# Altium PCB 传感器板2.PcbDoc (part 1 of 2)
Units mil, origin at the board's own origin, x right, y up, seen from the top; angles counter-clockwise.
Board outline 3909.32 x 2704.64 mil, 2 copper layers (Top Layer, Bottom Layer); 96 components, 116 nets, 368 pads, 95 vias.
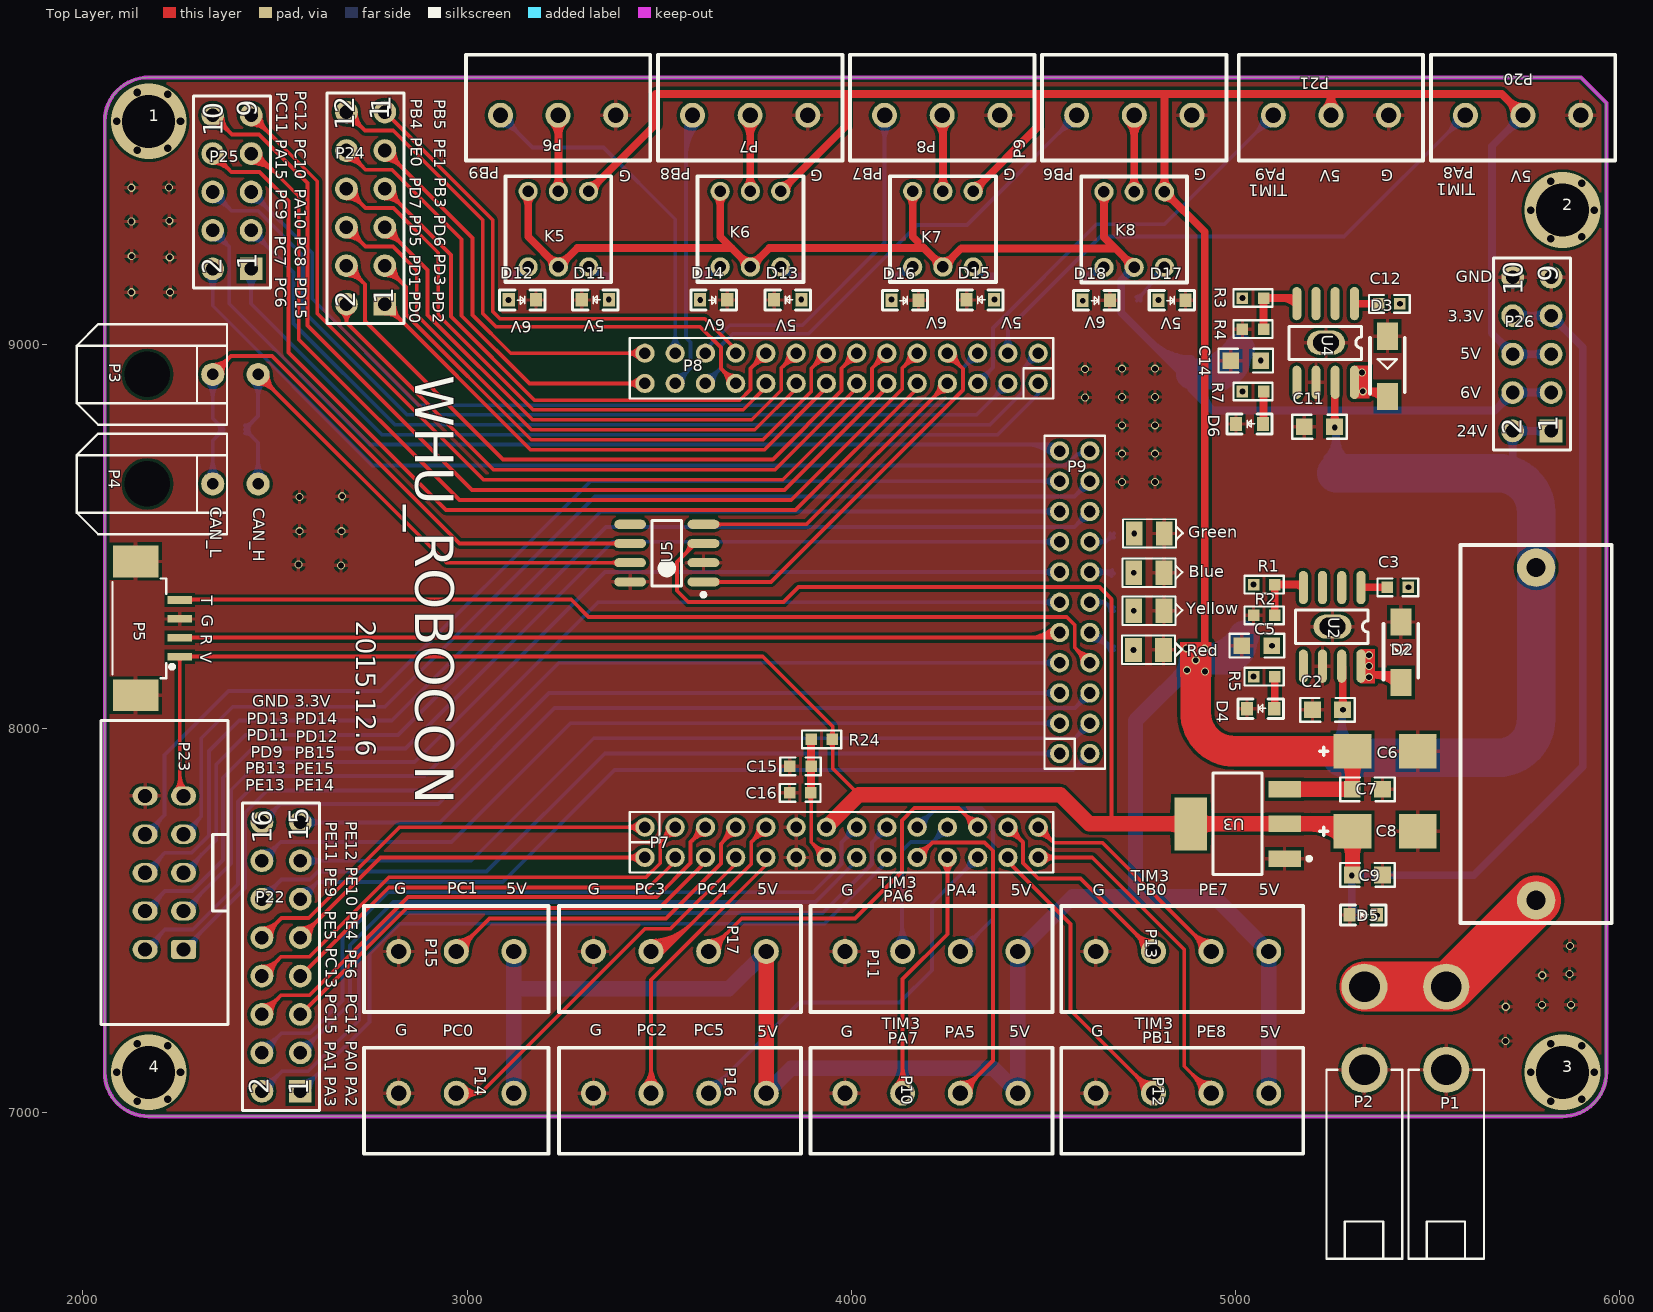
[diagram p0: Top Layer view]
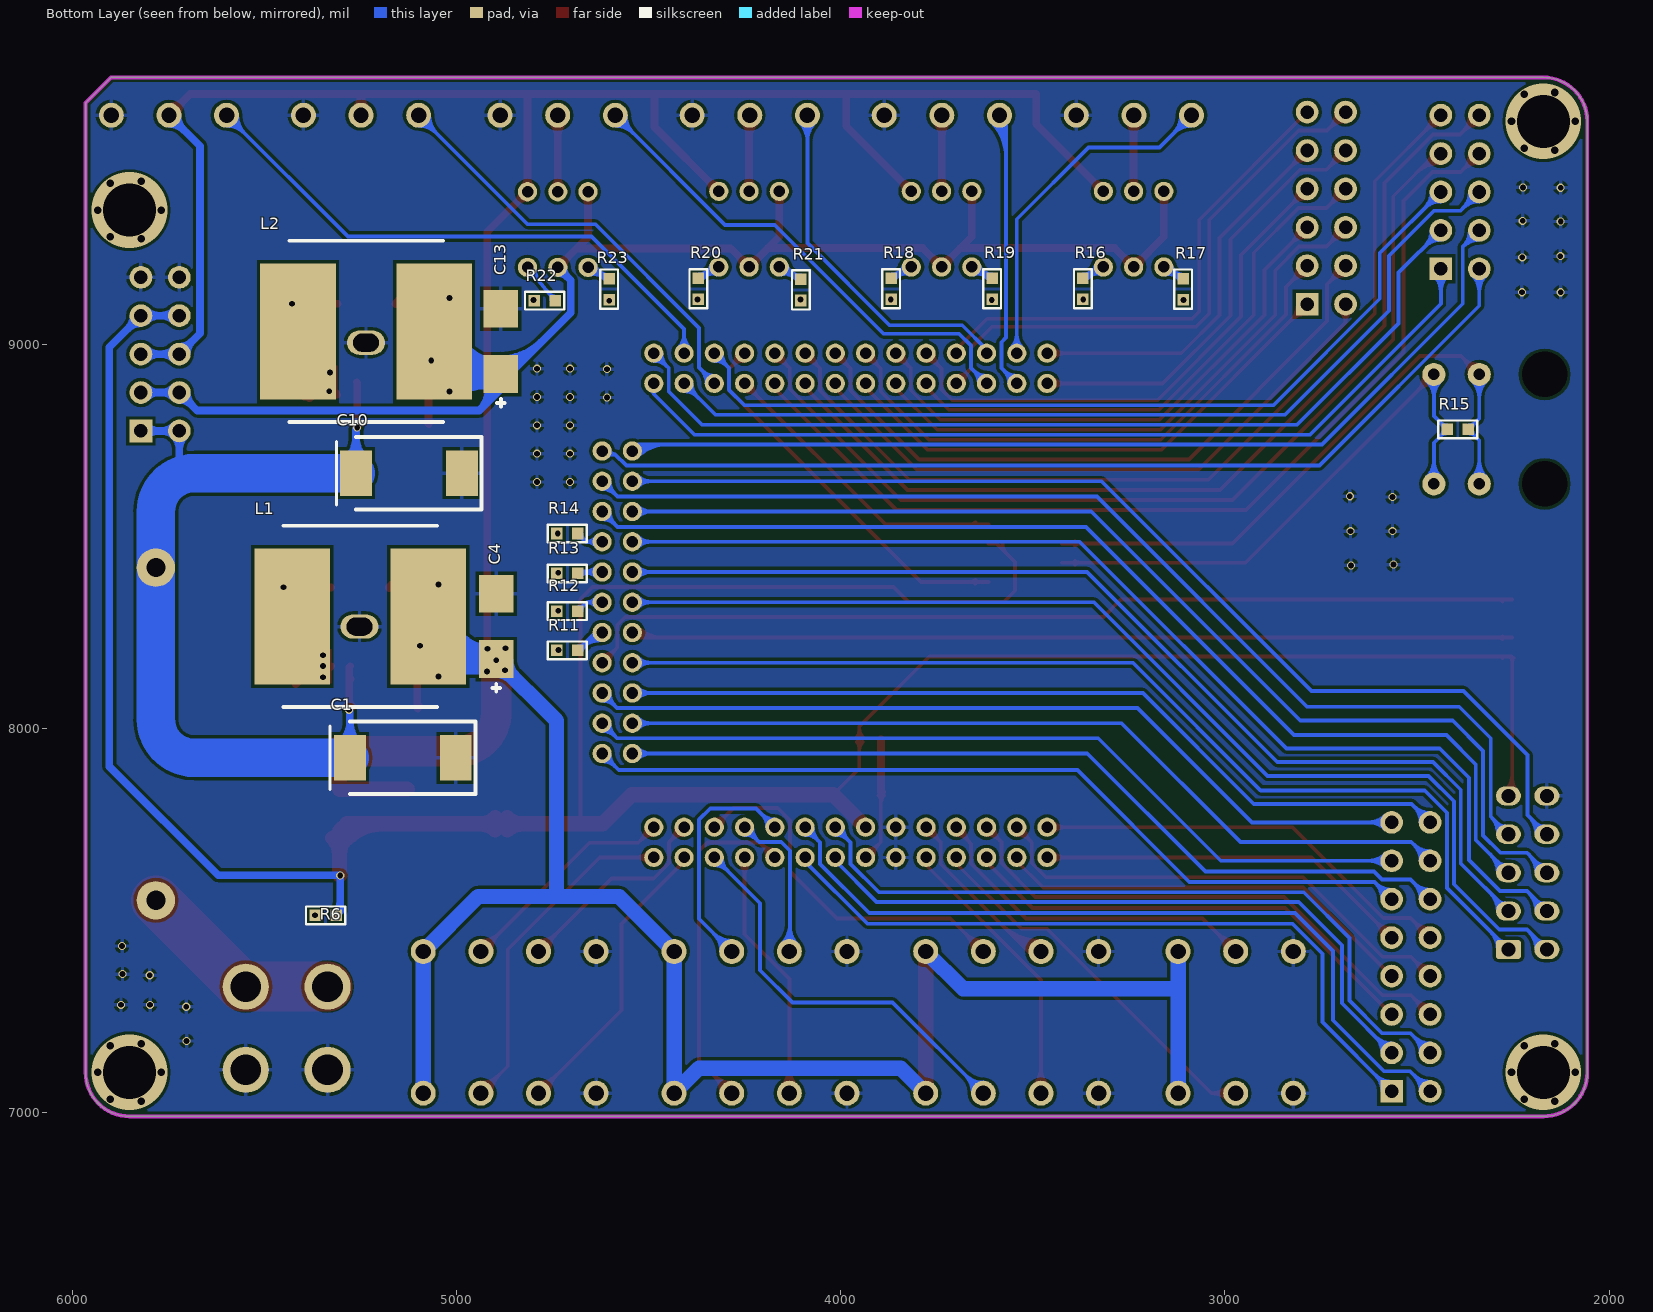
[diagram p1: Bottom Layer view, seen from below]

## Layer stack, top to bottom
Top Layer: signal copper 1.4
Dielectric: dielectric 12.6, FR-4, Dk 4.8
Bottom Layer: signal copper 1.4

## Board outline
2056.68,7105 2056.68,9581 cw(c2171,9581) 2171,9695.32 5899.68,9695.32 5966,9629 5966,7105 cw(c5851.68,7105) 5851.68,6990.68 2171,6990.68 cw(c2171,7105)

## Design rules (kind name [scope] priority, off if disabled: settings)
Clearance [All] p1: gap=8
HoleSize [All] p1: absolutevalues=TRUE maxlimit=500 minlimit=1 maxpercent=80.000 minpercent=20.000
HoleToHoleClearance [All] p1: gap=2 allowstackedmicrovias=TRUE
MinimumSolderMaskSliver [All] p1: minsoldermaskwidth=5
PolygonConnect [All] p1: connectstyle=Relief reliefconductorwidth=10 reliefentries=4 polygonreliefangle="90 Angle"
RoutingVias [All] p1: holewidth=28 width=50 viastyle="Through Hole" minholewidth=28 minwidth=50 maxholewidth=28 maxwidth=50
SilkToSilkClearance [All] p1: silktosilkclearance=0
SilkscreenOverComponentPads [All] p1: minsilkscreentomaskgap=0
SolderMaskExpansion [All] p1: expansion=4
Width [All] p1: maxlimit=200 minlimit=10 preferedwidth=10
23 further rules are at their usual default settings.

## Classes and differential pairs
component class 传感器板2: 1 2 3 4 Blue C1 C2 C3 C4 C5 C6 C7 C8 C9 C10 C11 C12 C13 C14 C15 C16 D2 D3 D4 D5 D6 D7 D11 D12 D13 D14 D15 D16 D17 D18 Green K5 K6 K7 K8 L1 L2 P1 P2 P3 P4 P5 P10 P11 P12 P13 P14 P15 P16 P17 P22 P23 P24 P25 P26 R1 R2 R3 R4 R5 R6 R7 R11 R12 R13 R14 R15 R16 R17 R18 R19 R20 R21 R22 R23 R24 Red U2 U3 U4 U5 Yellow

## Components (designator, comment, footprint, x,y, rotation, side; value= is the part's Value field where it differs from the comment)
1 "定位孔" 定位孔 2171,9581 r90 top
2 "定位孔" 定位孔 5851.68,9350 r90 top
3 "定位孔" 定位孔 5851.68,7105 r90 top
4 "定位孔" 定位孔 2171,7105 r90 top
Blue "LED(0805)" LED(0805) 4775,8406 r270 top
C1 "106T" "TAN CAP" 5078,7949 r180 bottom
C2 "1UF(0805)" CAP(0805) 5240,8049 r180 top
C3 "0.01UF(0603)" CAP(0603) 5423,8368 r180 top
C4 "106C" TAN106C 4897,8181 r90 bottom
C5 "1UF(0805)" CAP(0805) 5056,8216 r180 top
C6 "106C" TAN106C 5305,7941 r0 top
C7 "0.1UF(0805)" CAP(0805) 5344,7842 r0 top
C8 "106C" TAN106C 5305,7733 r0 top
C9 "0.1UF(0805)" CAP(0805) 5344,7619 r0 top
C10 "106T" "TAN CAP" 5062,8690 r180 bottom
C11 "1UF(0805)" CAP(0805) 5219,8786 r180 top
C12 "0.01UF(0603)" CAP(0603) 5401,9106 r180 top
C13 "106C" TAN106C 4885,8923 r90 bottom
C14 "1UF(0805)" CAP(0805) 5027,8958 r180 top
C15 "10UF(0603)" CAP(0603) 3868,7902 r0 top
C16 "0.1UF(0603)" CAP(0603) 3867,7833 r0 top
D2 "B340" B340 5431,8199 r270 top
D3 "B340" B340 5396,8943 r270 top
D4 "LED红(0603)" LED红(0603) 5066.01,8052 r180 top
D5 "LED蓝(0603)" LED蓝(0603) 5333,7515 r180 top
D6 "LED黄(0603)" LED黄(0603) 5037.01,8793 r180 top
D11 "LED蓝(0603)" LED蓝(0603) 3334,9116 r180 top
D12 "LED红(0603)" LED红(0603) 3144,9116 r0 top
D13 "LED蓝(0603)" LED蓝(0603) 3835,9116 r180 top
D14 "LED红(0603)" LED红(0603) 3642,9116 r0 top
D15 "LED蓝(0603)" LED蓝(0603) 4336,9116 r180 top
D16 "LED红(0603)" LED红(0603) 4140,9115 r0 top
D17 "LED蓝(0603)" LED蓝(0603) 4835,9115 r0 top
D18 "LED红(0603)" LED红(0603) 4638,9115 r0 top
Green "LED(0805)" LED(0805) 4776,8508 r270 top
K5 "andongkaiguan" PCBComponent_1#1 3100,9438 r270 top
K6 "andongkaiguan" PCBComponent_1#1 3600,9438 r270 top
K7 "andongkaiguan" PCBComponent_1#1 4101,9438 r270 top
K8 "andongkaiguan" PCBComponent_1#1 4599,9437 r270 top
L1 "L_22uH" L_22uH 5251,8292 r270 bottom
L2 "L_22uH" L_22uH 5236,9034 r270 bottom
P1 "MX4.2mm 5569 2X1AW" "MX4.2mm 5569 2X1AW" 5549,7220 r90 top
P2 "MX4.2mm 5569 2X1AW" "MX4.2mm 5569 2X1AW" 5336,7220 r90 top
P3 "MX3.0mm_43025_2Pin" MX3.0mm_43025_2Pin 1955,8804 r0 top
P4 "MX3.0mm_43025_2Pin" MX3.0mm_43025_2Pin 1955,8519 r0 top
P5 "MOLEX1.25_4Pin" MOLEX1.25_4Pin 2252,8261 r90 top
P6 "KF2EDG_3P" PCBComponent_1#2 3237,9596.76 r180 top
P7 "Header_2x14(2.0mm)" Header_2x14(2.0mm) 3975,7704 r0 top
P7 "KF2EDG_3P" PCBComponent_1#2 3737,9596.76 r180 top
P8 "Header_2x14(2.0mm)" Header_2x14(2.0mm) 3975,8938 r180 top
P8 "KF2EDG_3P" PCBComponent_1#2 4237,9596.76 r180 top
P9 "Header_2x11(2.0mm)" Header_2x11(2.0mm) 4582,8329 r90 top
P9 "KF2EDG_3P" PCBComponent_1#2 4737,9596.76 r180 top
P10 "KF2EDG_4P" PCBComponent_1#3 4209,7051 r0 top
P11 "KF2EDG_4P" PCBComponent_1#3 4209,7420 r0 top
P12 "KF2EDG_4P" PCBComponent_1#3 4862,7051 r0 top
P13 "KF2EDG_4P" PCBComponent_1#3 4862,7420 r0 top
P14 "KF2EDG_3P" PCBComponent_1#2 2972,7051 r0 top
P15 "KF2EDG_3P" PCBComponent_1#2 2972,7420 r0 top
P16 "KF2EDG_4P" PCBComponent_1#3 3554,7051 r0 top
P17 "KF2EDG_4P" PCBComponent_1#3 3554,7420 r0 top
P20 "KF2EDG_3P" PCBComponent_1#2 5749,9596.76 r180 top
P21 "KF2EDG_3P" PCBComponent_1#2 5249,9596.76 r180 top
P22 "Header 8X2" HDR2X8 2566,7056 r90 top
P23 "2x5HDR_F" 2x5HDR_F 2212,7625 r0 top
P24 "Header 6X2" HDR2X6 2786,9105 r90 top
P25 "Header 5X2" HDR2X5 2438,9197 r90 top
P26 "Header 5X2" HDR2X5 5822,8775 r90 top
R1 "10K(0603)" RES(0603) 5075,8375 r0 top
R2 "3.24K(0603)" RES(0603) 5075,8295.13 r180 top
R3 "3.9K(0603)" RES(0603) 5046,9121 r0 top
R4 "1K(0603)" RES(0603) 5046,9039.88 r180 top
R5 "4.7K(0603)" RES(0603) 5075,8135.4 r180 top
R6 "2K(0603)" RES(0603) 5341,7514 r180 bottom
R7 "4.7K(0603)" RES(0603) 5046,8877.65 r180 top
R11 "1K(0603)" RES(0603) 4712,8204 r180 bottom
R12 "1K(0603)" RES(0603) 4712,8306 r180 bottom
R13 "1K(0603)" RES(0603) 4712,8404 r180 bottom
R14 "1K(0603)" RES(0603) 4712,8508 r180 bottom
R15 "120R(0603)" RES(0603) 2394,8779 r180 bottom
R16 "RES(0603)" RES(0603) 3370,9145 r90 bottom
R17 "RES(0603)" RES(0603) 3109,9144 r90 bottom
R18 "RES(0603)" RES(0603) 3869,9145 r90 bottom
R19 "RES(0603)" RES(0603) 3606,9145 r90 bottom
R20 "RES(0603)" RES(0603) 4371,9145 r90 bottom
R21 "RES(0603)" RES(0603) 4104,9142 r90 bottom
R22 "RES(0603)" RES(0603) 4771,9114 r180 bottom
R23 "RES(0603)" RES(0603) 4603,9144 r90 bottom
R24 "RES(0603)" RES(0603) 3923,7972 r0 top
Red "LED(0805)" LED(0805) 4774,8205 r270 top
U2 "TPS5430" TPS5430 5252,8265 r270 top
U3 "AMS1117-3.3" AMS1117-3.3 5006,7752 r90 top
U4 "TPS5430" TPS5430 5235,9004 r270 top
U5 "VP230" VP230 3520,8457 r180 top
Yellow "LED(0805)" LED(0805) 4775,8307 r270 top
? "BAOXIANZUO" BAOXIANZUO 5783,7553 r90 top

## Footprints (in the part's own frame and the unit in brackets; to place one, negate y for a bottom-side part, rotate by r counter-clockwise, add the part's x,y. Pads: shape width x height; smd on the part's side, far side on the other; paste and mask are expansions set on the pad)
2x5HDR_F [mil]
  rrect30% 65x50 hole 37: 1(50,-200)
  oval 65x50 hole 37: 2(-50,-200) 3(50,-100) 4(-50,-100) 5(50,0) 6(-50,0) 7(50,100) 8(-50,100) 9(50,200) 10(-50,200)
  silkscreen extent -165,-396 165,396
AMS1117-3.3 [mm]
  rect 1.1x2.15 smd: 1(-2.3,-3.1) 2(0,-3.1) 3(2.3,-3.1)
  rect 3.5x2.15 smd: 4(0,3.1)
  silkscreen extent -3.35,-4.85 3.35,1.63
B340 [mm]
  rect 1.8x1.4 smd: 1(-2,0) 2(2,0)
  silkscreen extent -1.87,-1.14 1.81,1.14
BAOXIANZUO [mm]
  round 2.54 hole 1.27: 1(0,0) 2(22,0)
  silkscreen extent -1.5,-5 23.5,5
CAP(0603) [mil]
  rect 30x30 smd mask+1: 1(27.5,0) 2(-27.5,0)
  silkscreen extent -53,-23 53,23
CAP(0805) [mm]
  rect 1.1x1.1 smd mask+0.025: 1(-0.994,0) 2(0.995,0)
  silkscreen extent -1.8,-0.79 1.8,0.79
HDR2X5 [mm] "Connec"
  rect 1.5x1.5 hole 0.9: 1(0,0)
  round 1.5 hole 0.9: 2(0,2.54) 3(2.54,0) 4(2.54,2.54) 5(5.08,0) 6(5.08,2.54) 7(7.62,0) 8(7.62,2.54) 9(10.16,0) 10(10.16,2.54)
  silkscreen extent -1.27,-1.27 11.43,3.81
HDR2X6 [mm] "Connec"
  rect 1.5x1.5 hole 0.9: 1(0,0)
  round 1.5 hole 0.9: 2(0,2.54) 3(2.54,0) 4(2.54,2.54) 5(5.08,0) 6(5.08,2.54) 7(7.62,0) 8(7.62,2.54) 9(10.16,0) 10(10.16,2.54) 11(12.7,0) 12(12.7,2.54)
  silkscreen extent -1.27,-1.27 13.97,3.81
HDR2X8 [mm] "Connector; Header; 8x2 Po"
  rect 1.5x1.5 hole 0.9: 1(0,0)
  round 1.5 hole 0.9: 2(0,2.54) 3(2.54,0) 4(2.54,2.54) 5(5.08,0) 6(5.08,2.54) 7(7.62,0) 8(7.62,2.54) 9(10.16,0) 10(10.16,2.54) 11(12.7,0) 12(12.7,2.54) 13(15.24,0) 14(15.24,2.54) 15(17.78,0) 16(17.78,2.54)
  silkscreen extent -1.27,-1.27 19.05,3.81
Header_2x11(2.0mm) [mm]
  round 1.27 hole 0.762 mask+0.025: 1(-10,1) 2(-10,-1) 3(-8,1) 4(-8,-1) 5(-6,1) 6(-6,-1) 7(-4,1) 8(-4,-1) 9(-2,1) 10(-2,-1) 11(0,1) 12(0,-1) 13(2,1) 14(2,-1) 15(4,1) 16(4,-1) 17(6,1) 18(6,-1) 19(8,1) 20(8,-1) 21(10,1) 22(10,-1)
  silkscreen extent -11,-2 11,2
Header_2x14(2.0mm) [mm]
  round 1.27 hole 0.762 mask+0.025: 1(-13,1) 2(-13,-1) 3(-11,1) 4(-11,-1) 5(-9,1) 6(-9,-1) 7(-7,1) 8(-7,-1) 9(-5,1) 10(-5,-1) 11(-3,1) 12(-3,-1) 13(-1,1) 14(-1,-1) 15(1,1) 16(1,-1) 17(3,1) 18(3,-1) 19(5,1) 20(5,-1) 21(7,1) 22(7,-1) 23(9,1) 24(9,-1) 25(11,1) 26(11,-1) 27(13,1) 28(13,-1)
  silkscreen extent -14,-2 14,2
L_22uH [mm]
  rect 9x5 smd: 1(0,4.5) 2(0,-4.5)
  silkscreen extent -6,-5.08 5.99,5.08
LED(0805) [mil]
  rect 63x43.31 smd mask+1: 1(0,39.15) 2(0,-39.15)
  silkscreen extent -37,-69 37,87
LED红(0603) [mm]
  rect 0.8x0.9 smd: 1(-0.9,0) 2(0.9,0)
  silkscreen extent -1.5,-0.65 1.5,0.65
LED蓝(0603) [mm]
  rect 0.8x0.9 smd: 1(-0.9,0) 2(0.9,0)
  silkscreen extent -1.5,-0.65 1.5,0.65
LED黄(0603) [mm]
  rect 0.8x0.9 smd: 1(-0.9,0) 2(0.9,0)
  silkscreen extent -1.5,-0.65 1.5,0.65
MOLEX1.25_4Pin [mm]
  rect 0.5x1.6 smd: 1(-1.875,0) 2(-0.625,0) 3(0.625,0) 4(1.875,0)
  rect 2.1x3 smd: 5(-4.425,2.9) 6(4.425,2.9)
  silkscreen extent -3.3,0.38 3.3,4.44
MX3.0mm_43025_2Pin [mil]
  round 60 hole 30 mask+1: 1(383,118.09) 2(501.11,118.09)
  round 0 hole 118.11: ""(212.92,118.09)
  silkscreen extent 29,-13 420,249
"MX4.2mm 5569 2X1AW" [mil]
  round 120 hole 80: 1(-108.27,0) 2(108.27,0)
  silkscreen extent -600,-98 -108,98
PCBComponent_1#1 [mm]
  round 1.27 hole 0.762: 1(1,5.5) 2(1,3.5) 3(1,1.5) 4(6,5.5) 5(6,3.5) 6(6,1.5)
  silkscreen extent 0,0 7,7
PCBComponent_1#2 [mm]
  round 1.651 hole 1.016: 1(-3.81,0) 2(0,0) 3(3.81,0)
  silkscreen extent -6.1,-4 6.1,3
PCBComponent_1#3 [mm]
  round 1.651 hole 1.016: 1(-5.715,0) 2(-1.905,0) 3(1.905,0) 4(5.715,0)
  silkscreen extent -8,-4 8,3
RES(0603) [mil]
  rect 30x30 smd mask+1: 1(27.5,0) 2(-27.5,0)
  silkscreen extent -51,-23 51,23
TAN106C [mil]
  rect 98.43x90 smd: 1(0,0) 2(170,0)
  silkscreen extent -85,-10 -65,10
"TAN CAP" [mm]
  rect 2.1x3 smd: 1(-5.08,-0.635) 2(1.92,-0.635)
  silkscreen extent -6.38,-3.04 3.22,1.76
TPS5430 [mm]
  oval 2.2x0.6 smd: 1(-2.6,1.905) 2(-2.6,0.635) 3(-2.6,-0.635) 4(-2.6,-1.905) 5(2.6,-1.905) 6(2.6,-0.635) 7(2.6,0.635) 8(2.6,1.905)
  oval 1.6x2.5 hole 1.2 slot 1.7 at 90 deg: 9(-0.016,0.025)
  silkscreen extent -1.1,-2.41 1.1,2.36
VP230 [mm]
  oval 2.1x0.6 smd: 1(-2.425,1.905) 2(-2.425,0.635) 3(-2.425,-0.635) 4(-2.425,-1.905) 5(2.425,-1.905) 6(2.425,-0.635) 7(2.425,0.635) 8(2.425,1.905)
  silkscreen extent -2.55,-2.15 0.98,2.88, body extent -3.03,-2.5 3.03,2.5, height 1.9
定位孔 [mil]

## Part data
Blue Green Red Yellow: library part LED
C2 C3 C5 C7 C9 C11 C12 C14 C15 C16: library part CAP
C4 C6 C8 C13 U2 U4: library part T
D4 D5 D6 D11 D12 D13 D14 D15 D16 D17 D18: library part L
K5 K6 K7 K8: library part andongk
P1 P2: library part "MX4.2mm 5569"
P3 P4: library part MX3.0mm_4302
P5: library part MOLEX1.2
P6 P7 P8 P9 P10 P11 P12 P13 P14 P15 P16 P17 P20 P21: library part KF2
P7 P8: library part Header_2x14(
P9: library part Header_2x11(
P22: "Header, 8-Pin, Dual row"
P23: library part 2x
P24: "Header, 6-Pin, Dual row"
P25 P26: "Header, 5-Pin, Dual row"
R1 R2 R3 R4 R5 R6 R7 R11 R12 R13 R14 R15 R16 R17 R18 R19 R20 R21 R22 R23 R24: library part RES
U3: library part AMS11
?: library part BAOX

## Via types
v1: diameter 21, hole 15, Top Layer to Bottom Layer, 67 vias
v2: diameter 19.68, hole 19.68, Top Layer to Bottom Layer, 24 vias
v3: diameter 196.85/196.85 (per signal layer), hole 137.8, Top Layer to Bottom Layer, 4 vias

## Nets (pads, with @x,y where several pads share a name; then routed paths per layer and width w, separated by ;. In a path a pad name is that pad's centre, name@x,y a point inside that pad or via, vN(x,y) a via of type N, cw(c..) or ccw(c..) an arc to the next point about the centre after c; other vN are vias at no path point)
3.3V: C8.1 C9.1 P5.1 P7.13 P23.9 P26.7 P26.8 R6.1 R24.1 U3.2 U3.4 U5.3 | length 8843.3
  Top Layer w10: P23.9@2240.36,7839.14 ccw(c2212.25,7867.25) 2252,7867.25 ; P23.9@2246.97,7843.53 ccw(c2243.94,7851) 2252,7851 ; P5.1@2248.58,8183.76 cw(c2240.31,8175.49) 2252,8175.49 cw(c2263.69,8175.49) P5.1@2255.42,8183.76 ; 2252,7855.18 ccw(c2284.68,7855.18) P23.9@2261.57,7832.07 ; 2252,7879.32 ccw(c2308.82,7879.32) P23.9@2268.64,7839.14 ; P5.1@2252,8187.18 2252,7851 ; P5.1@2254,8188.18 3769.82,8188.18 3952,8006 3952,7896.26 4020.26,7828 ; P23.9@2257.37,7844.79 cw(c2258.27,7851) 2252,7851 ; P23.9@2277,7826 2252,7851 ; P5.1@2277.08,8183.76 cw(c2287.76,8173.08) 2287.76,8188.18 ; 3567.91,8454.91 ccw(c3540.83,8482) U5.3@3579.13,8482 ; U5.3@3615.47,8482 3595,8482 3547,8434 3547,8359 3576,8330 3824,8330 3863,8369 4646,8369 4678,8337 4678,7752 ; R24.1@3943.43,7964.93 cw(c3922.74,7944.24) 3952,7944.24 ; R24.1@3943.43,7979.07 ccw(c3922.74,7999.76) 3952,7999.76 ; 3952,7951.48 cw(c3971.02,7951.48) R24.1@3957.57,7964.93 ; 3952,7992.52 ccw(c3971.02,7992.52) R24.1@3957.57,7979.07
  Top Layer w40: P7.13@3935.63,7743.37 4020.26,7828 4544,7828 4620,7752 4678,7752 U3.4@4883.95,7752 U3.2@5128.05,7752 5286,7752 C8.1@5305,7733 5305,7619.15 C9.1@5304.85,7619 ; U3.4@4868.17,7736.22 ccw(c4830.06,7698.11) 4830.06,7752 ccw(c4830.06,7805.89) U3.4@4868.17,7767.78 ; U3.4@4899.74,7736.22 cw(c4937.84,7698.11) 4937.84,7752 cw(c4937.84,7805.89) U3.4@4899.74,7767.78 ; 5194.56,7752 cw(c5194.56,7626.77) C8.1@5283.11,7715.32 ; C8.1@5287.32,7715.32 cw(c5244.64,7672.64) 5305,7672.64 cw(c5365.36,7672.64) C8.1@5322.68,7715.32
  Bottom Layer w20: 5303,7551.42 ccw(c5350.92,7551.42) R6.1@5317.04,7517.54 ; R6.1@5313.5,7514 5303,7524.5 v1(5303,7618) 5621,7618 5904.53,7901.53 5904.53,8992.47 P26.7@5822,9075 P26.8@5722,9075 ; P26.8@5735.81,9061.19 cw(c5769.14,9027.86) 5769.14,9075 cw(c5769.14,9122.14) P26.8@5735.81,9088.81 ; P26.7@5808.19,9061.19 ccw(c5774.86,9027.86) 5774.86,9075 ccw(c5774.86,9122.14) P26.7@5808.19,9088.81 ; P26.7@5822,9055.47 cw(c5822,9008.33) 5855.34,9041.66 cw(c5888.67,9075) P26.7@5841.53,9075
5V: C4.1 C5.1 C6.1 C7.1 K5.1 K6.1 K7.1 K8.1 L1.1 P10.4 P11.4 P12.4 P13.4 P14.3 P15.3 P16.4 P17.4 P20.2 P21.2 P26.5 P26.6 R1.2 R5.1 U3.3 | length 12002.4
  Top Layer w20: K5.1@3316.54,9398.63 3491,9573.09 3491,9652 3988,9652 ; K5.1@3316.54,9413.63 ccw(c3316.54,9449.84) 3342.14,9424.24 ccw(c3367.75,9398.63) K5.1@3331.54,9398.63 ; K6.1@3816.54,9398.63 3986,9568.09 3986,9650 3988,9652 ; K6.1@3816.54,9413.63 ccw(c3816.54,9449.84) 3842.14,9424.24 ccw(c3867.75,9398.63) K6.1@3831.54,9398.63 ; K7.1@4317.54,9398.63 4485,9566.09 4485,9652 ; K7.1@4317.54,9413.63 ccw(c4317.54,9449.84) 4343.14,9424.24 ccw(c4368.75,9398.63) K7.1@4332.54,9398.63 ; 4485,9653 4485,9652 ; K8.1@4804.93,9408.24 ccw(c4779.32,9433.84) 4815.54,9433.84 ccw(c4851.75,9433.84) K8.1@4826.14,9408.24 ; K8.1@4815.54,9382.63 cw(c4815.54,9346.42) 4841.14,9372.02 cw(c4866.75,9397.63) K8.1@4830.54,9397.63 ; v1(4920,8208) 4920,9293.17 K8.1@4815.54,9397.63 4815.54,9650.46 4814,9652 ; P21.2@5233.09,9612.67 ccw(c5194.68,9651.08) 5249,9651.08 ccw(c5303.32,9651.08) P21.2@5264.91,9612.67 ; P21.2@5249,9596.76 5249,9652 ; P20.2@5726.5,9596.76 ccw(c5672.18,9596.76) 5710.59,9635.17 ccw(c5749,9673.58) P20.2@5749,9619.26 ; P20.2@5749,9596.76 5693.76,9652 5249,9652 ; 3988,9652 4485,9652 ; 4485,9652 4814,9652 ; 4814,9652 5249,9652
  Top Layer w40: P16.4@3779,7051 P17.4@3779,7420 ; U3.3@5128.05,7842.55 5128.6,7842 C7.1@5304.85,7842 5305,7842.15 C6.1@5305,7941 ; C6.1@5287.32,7923.32 cw(c5244.64,7880.64) 5305,7880.64 cw(c5365.36,7880.64) C6.1@5322.68,7923.32
  Top Layer w80: v1(4897,8178) 4897,8041 ccw(c4997,8041) 4997,7941 C6.1@5305,7941
  Bottom Layer w20: P26.6@5702.47,8975 ccw(c5655.33,8975) 5688.66,9008.34 ccw(c5722,9041.67) P26.6@5722,8994.53 ; P20.2@5726.5,9596.76 cw(c5672.18,9596.76) 5710.59,9558.35 cw(c5749,9519.94) P20.2@5749,9574.26 ; P26.6@5735.81,8961.19 cw(c5769.14,8927.86) 5769.14,8975 cw(c5769.14,9022.14) P26.6@5735.81,8988.81 ; P20.2@5749,9596.76 5668,9515.76 5668,9029 P26.6@5722,8975 P26.5@5822,8975 ; P26.5@5808.19,8961.19 ccw(c5774.86,8927.86) 5774.86,8975 ccw(c5774.86,9022.14) P26.5@5808.19,8988.81
  Bottom Layer w40: P14.3@3122,7051 3122,7323 ; P15.3@3122,7420 3122,7323 ; P16.4@3779,7051 3844,7116 4369,7116 P10.4@4434,7051 P11.4@4434,7420 4577,7563 4740,7563 ; P17.4@3779,7420 3682,7323 3122,7323 ; C4.1@4852.25,8133.25 cw(c4897,8088.5) C4.1@4897,8151.79 ; C4.1@4855.18,8136.18 ccw(c4814.57,8176.79) C4.1@4872,8176.79 ; v1(4897,8178) 4740,8021 4740,7563 ; P12.4@5087,7051 P13.4@5087,7420 4944,7563 4740,7563
  Bottom Layer w80: C4.1@4897,8181 4972,8181 ccw(c4972,8225.09) L1.1@5015.8,8220 ; C4.1@4921.01,8181 ccw(c4921.01,8296.7) L1.1@5022.55,8241.26
  other v1: 5047.5,8135.4 4921,8149 4874,8152 4873,8209 5095.15,8216 5047.5,8375
6V: C13.1 C14.1 K5.3 K5.5 K6.3 K6.5 K7.3 K7.5 K8.3 K8.5 L2.1 P26.3 P26.4 R3.2 R7.1 | length 5273.7
  Top Layer w20: K5.3@3148.45,9388.02 cw(c3122.84,9362.42) 3159.06,9362.42 cw(c3195.27,9362.42) K5.3@3169.66,9388.02 ; K5.3@3159.06,9398.63 3159.06,9280.52 K5.5@3237.8,9201.78 3287.02,9251 3688.57,9251 ; K5.5@3222.8,9201.78 ccw(c3186.58,9201.78) 3212.19,9227.39 ccw(c3237.8,9252.99) 3237.8,9216.78 ccw(c3237.8,9252.99) 3263.4,9227.39 ccw(c3289.01,9201.78) K5.5@3252.8,9201.78 ; K6.3@3648.45,9388.02 cw(c3622.84,9362.42) 3659.06,9362.42 cw(c3695.27,9362.42) K6.3@3669.66,9388.02 ; K6.3@3659.06,9398.63 3659.06,9280.52 3688.57,9251 ; K6.5@3722.8,9201.78 ccw(c3686.58,9201.78) 3712.19,9227.39 ccw(c3737.8,9252.99) 3737.8,9216.78 ccw(c3737.8,9252.99) 3763.4,9227.39 ccw(c3789.01,9201.78) K6.5@3752.8,9201.78 ; K7.3@4149.45,9388.02 cw(c4123.84,9362.42) 4160.06,9362.42 cw(c4196.27,9362.42) K7.3@4170.66,9388.02 ; K7.3@4160.06,9398.63 4160.06,9280.52 4189.57,9251 ; K7.5@4223.8,9201.78 ccw(c4187.58,9201.78) 4213.19,9227.39 ccw(c4238.8,9252.99) 4238.8,9216.78 ccw(c4238.8,9252.99) 4264.4,9227.39 ccw(c4290.01,9201.78) K7.5@4253.8,9201.78 ; K8.3@4647.45,9387.02 cw(c4621.84,9361.42) 4658.06,9361.42 cw(c4694.27,9361.42) K8.3@4668.66,9387.02 ; K8.3@4658.06,9397.63 4658.06,9279.52 4687.57,9250 ; K8.5@4721.8,9200.78 ccw(c4685.58,9200.78) 4711.19,9226.39 ccw(c4736.8,9251.99) K8.5@4736.8,9215.78 ; K8.5@4736.8,9200.78 4687.57,9250 ; 3688.57,9251 K6.5@3737.8,9201.78 3787.02,9251 4189.57,9251 ; 4189.57,9251 K7.5@4238.8,9201.78 4287.02,9250 4687.57,9250
  Bottom Layer w20: K8.5@4721.8,9200.78 cw(c4685.58,9200.78) 4711.19,9175.17 cw(c4736.8,9149.57) K8.5@4736.8,9185.78 ; K8.5@4736.8,9200.78 4703,9166.98 4703,9083 4863,8923 C13.1@4885,8923 4885,8884 4941,8828 ; 4780.5,9005.5 ccw(c4885,9109.99) C13.1@4885,8962.21 ; 4814.65,8971.35 ccw(c4885,9041.71) C13.1@4885,8942.21 ; C13.1@4899.51,8914.97 ccw(c4962.22,8898.48) 4916.37,8852.63 ; C13.1@4918.85,8909.89 ccw(c5001.22,8888.23) 4941,8828 ; P26.4@5702.47,8875 cw(c5655.33,8875) 5688.66,8841.66 cw(c5722,8808.33) P26.4@5722,8855.47 ; P26.4@5735.81,8861.19 cw(c5769.14,8827.86) 5769.14,8875 cw(c5769.14,8922.14) P26.4@5735.81,8888.81 ; P26.3@5808.19,8861.19 ccw(c5774.86,8827.86) 5774.86,8875 ccw(c5774.86,8922.14) P26.3@5808.19,8888.81 ; P26.3@5822,8875 P26.4@5722,8875 5675,8828 4941,8828
  Bottom Layer w80: 4960,8919 4956,8923 ; L2.1@5000.87,8962.57 cw(c4956,8968.22) 4956,8923 ; L2.1@5010.92,8988.69 cw(c4885.01,9076.51) C13.1@4885,8923 4956,8923
  other v1: 5018.5,8877.65 5066.15,8958 5018.5,9121
24V: ?.1 P1.2 P2.2 | length 540.1
  Top Layer w130: P2.2@5336,7328.27 P1.2@5549,7328.27 5558.27,7328.27 ?.1@5783,7553
CAN_H: P3.2 P4.2 R15.2 U5.7 | length 2041.8
  Top Layer w10: P3.2@2456.11,8897.09 cw(c2456.11,8836.74) 2498.79,8879.42 cw(c2541.47,8922.09) P3.2@2481.11,8922.09 ; P3.2@2456.11,8907.09 cw(c2456.11,8870.88) 2481.72,8896.49 cw(c2507.32,8922.09) P3.2@2471.11,8922.09 ; P3.2@2456.11,8922.09 2946.2,8432 U5.7@3424.53,8432 ; U5.7@3390.18,8427.18 ccw(c3378.56,8415.56) 3378.56,8432 ccw(c3378.56,8448.44) U5.7@3390.18,8436.82
  Bottom Layer w10: R15.2@2421.5,8769 cw(c2421.5,8744.86) 2438.57,8761.93 cw(c2455.64,8779) 2431.5,8779 cw(c2455.64,8779) 2438.57,8796.07 cw(c2421.5,8813.14) R15.2@2421.5,8789 ; P4.2@2438.43,8654.77 ccw(c2395.75,8697.45) 2456.11,8697.45 ccw(c2516.47,8697.45) P4.2@2473.79,8654.77 ; P3.2@2438.43,8904.42 cw(c2395.75,8861.74) 2456.11,8861.74 cw(c2516.47,8861.74) P3.2@2473.79,8904.42 ; P4.2@2445.5,8647.7 ccw(c2419.9,8673.31) 2456.11,8673.31 ccw(c2492.32,8673.31) P4.2@2466.72,8647.7 ; P3.2@2445.5,8911.49 cw(c2419.9,8885.88) 2456.11,8885.88 cw(c2492.32,8885.88) P3.2@2466.72,8911.49 ; P4.2@2456.11,8637.09 2456.11,8744.39 R15.2@2421.5,8779 2456.11,8813.61 P3.2@2456.11,8922.09
CAN_L: P3.1 P4.1 R15.1 U5.6 | length 2173.9
  Top Layer w10: P3.1@2338,8922.09 2385.91,8970 2492,8970 2980,8482 U5.6@3424.53,8482 ; P3.1@2338,8937.09 ccw(c2338,8973.31) 2363.61,8947.7 ccw(c2389.21,8922.09) P3.1@2353,8922.09 ; P3.1@2338,8947.09 ccw(c2338,9007.45) 2380.68,8964.77 ccw(c2423.36,8922.09) P3.1@2363,8922.09 ; U5.6@3390.18,8477.18 ccw(c3378.56,8465.56) 3378.56,8482 ccw(c3378.56,8498.44) U5.6@3390.18,8486.82
  Bottom Layer w10: P4.1@2320.32,8654.77 ccw(c2277.64,8697.45) 2338,8697.45 ccw(c2398.36,8697.45) P4.1@2355.68,8654.77 ; P3.1@2320.32,8904.42 cw(c2277.64,8861.74) 2338,8861.74 cw(c2398.36,8861.74) P3.1@2355.68,8904.42 ; P4.1@2327.39,8647.7 ccw(c2301.79,8673.31) 2338,8673.31 ccw(c2374.21,8673.31) P4.1@2348.61,8647.7 ; P3.1@2327.39,8911.49 cw(c2301.79,8885.88) 2338,8885.88 cw(c2374.21,8885.88) P3.1@2348.61,8911.49 ; P4.1@2338,8637.09 2338,8750.5 R15.1@2366.5,8779 2338,8807.5 P3.1@2338,8922.09 ; R15.1@2366.5,8769 ccw(c2366.5,8744.86) 2349.43,8761.93 ccw(c2332.36,8779) 2356.5,8779 ccw(c2332.36,8779) 2349.43,8796.07 ccw(c2366.5,8813.14) R15.1@2366.5,8789
GND: Blue.1 C1.2 C2.2 C4.2 C5.2 C6.2 C7.2 C8.2 C9.2 C10.2 C11.2 C13.2 C14.2 C15.2 C16.2 D2.1 D3.1 D4.2 D5.2 D6.2 D11.2 D12.2 D13.2 D14.2 D15.2 D16.2 D17.2 D18.2 Green.1 P1.1 P2.1 P5.3 P5.5 P5.6 P6.1 P7.1@3887,9596.76 P7.11 P7.12 P8.1@4387,9596.76 P9.1@4887,9596.76 P10.1 P11.1 P12.1 P13.1 P14.1 P15.1 P16.1 P17.1 P20.1 P21.1 P23.10 P26.9 P26.10 R2.1 R4.1 Red.1 U2.6 U2.9 U3.1 U4.6 U4.9 U5.2 U5.8 Yellow.1
  other v1: 5703,7187 5704,7276 5798,7281 5874,7281 5799,7358 5870,7361 5871,7434 2672,8425 2561,8427 2564,8514 2673,8514 2564,8603 2675,8605 4705,8642 4791,8642 4705,8715.75 4791,8715.75 4705,8789.5 4791,8789.5 4609,8862 4705,8863.25 4791,8863.25 4609,8935.75 4705,8937 4791,8937 2126,9136 2227,9136 2226,9227 2127,9230 2126,9320 2225,9322 2126,9408 2224,9409
INPUT: ?.2 C1.1 C2.1 C10.1 C11.1 P26.1 P26.2 U2.7 U4.7 | length 2948.2
  Top Layer w20: C11.1@5249.91,8794.24 ccw(c5227.98,8816.18) 5259,8816.18 ; v1(5259,8784) 5259,8900.64 U4.7@5260,8901.64 ; 5259,8812.09 ccw(c5284.24,8812.09) C11.1@5266.39,8794.24 ; C2.1@5270.91,8057.24 ccw(c5248.98,8079.18) 5280,8079.18 ; U2.7@5275.72,8129.86 cw(c5265.38,8119.53) 5280,8119.53 ; U2.7@5277,8162.64 5280,8159.64 v1(5280,8049) ; 5280,8075.09 ccw(c5305.24,8075.09) C2.1@5287.39,8057.24
  Bottom Layer w20: C10.1@5239.84,8704.88 ccw(c5186.34,8758.37) 5262,8758.37 ccw(c5337.66,8758.37) C10.1@5284.16,8704.88 ; C1.1@5255.84,7963.88 ccw(c5202.34,8017.37) 5278,8017.37 ccw(c5353.66,8017.37) C1.1@5300.16,7963.88 ; v1(5259,8784) 5262,8781 C10.1@5262,8665 ; C1.1@5278,7924 5278,8047 v1(5280,8049) ; 5683,8665 5722,8704 P26.2@5722,8775 P26.1@5822,8775 ; P26.2@5708.19,8761.19 cw(c5674.86,8727.86) 5722,8727.86 cw(c5769.14,8727.86) 5735.81,8761.19 cw(c5769.14,8727.86) 5769.14,8775 cw(c5769.14,8822.14) P26.2@5735.81,8788.81 ; 5755.43,8633.94 5757,8635.51 ; P26.1@5808.19,8761.19 ccw(c5774.86,8727.86) 5774.86,8775 ccw(c5774.86,8822.14) P26.1@5808.19,8788.81
  Bottom Layer w100: C10.1@5262,8665 5683,8665 cw(c5683,8565) 5755.43,8633.94 cw(c5683,8565) 5783,8565 ?.2@5783,8419.14 5783,8024 cw(c5683,8024) 5683,7924 C1.1@5278,7924
K1: K5.2 P6.2 | length 340.4
  Top Layer w20: P6.2@3221.09,9580.85 cw(c3180.27,9540.03) 3238,9540.03 ; K5.2@3227.19,9409.24 ccw(c3201.09,9435.34) 3238,9435.34 ; K5.2@3237.8,9398.63 3238,9398.83 P6.2@3238,9596.76 ; 3238,9434.35 ccw(c3273.51,9434.35) K5.2@3248.4,9409.24 ; 3238,9544.86 cw(c3288.91,9544.86) P6.2@3252.91,9580.85
K2: K6.2 P7.2@3737,9596.76 | length 340.7
  Top Layer w20: P7.2@3721.09,9580.85 cw(c3682.68,9542.44) 3737,9542.44 cw(c3791.32,9542.44) P7.2@3752.91,9580.85 ; K6.2@3727.19,9409.24 ccw(c3703.5,9432.92) 3737,9432.92 ; 3737,9436.76 ccw(c3775.93,9436.76) K6.2@3748.4,9409.24 ; P7.2@3737,9596.76 3737,9399.43 K6.2@3737.8,9398.63
K3: K7.2 P8.2@4237,9596.76 | length 341.1
  Top Layer w20: P8.2@4221.09,9580.85 cw(c4178.35,9538.11) 4238.8,9538.11 ; K7.2@4228.19,9409.24 ccw(c4202.58,9434.84) 4238.8,9434.84 ccw(c4275.01,9434.84) K7.2@4249.4,9409.24 ; P8.2@4237,9596.76 4238.8,9594.97 K7.2@4238.8,9398.63 ; 4238.8,9546.78 cw(c4286.99,9546.78) P8.2@4252.91,9580.85
K4: K8.2 P9.2@4737,9596.76 | length 341.3
  Top Layer w20: P9.2@4721.09,9580.85 cw(c4683.17,9542.94) 4736.8,9542.94 ; K8.2@4726.19,9408.24 ccw(c4700.58,9433.84) 4736.8,9433.84 ccw(c4773.01,9433.84) K8.2@4747.4,9408.24 ; K8.2@4736.8,9397.63 P9.2@4736.8,9596.76 ; 4736.8,9541.95 cw(c4791.81,9541.95) P9.2@4752.91,9580.85
NetBlue_2: Blue.2 R13.2
  other v1: 4735.85,8406
NetC3_1: C3.1 U2.1 | length 68.8
  Top Layer w20: U2.1@5327,8367.36 5327.64,8368 C3.1@5395.5,8368
NetC3_2: C3.2 D2.2 L1.2 U2.8 | length 207.8
  Top Layer w20: U2.8@5327,8162.64 v1@5349.64,8140 ; 5341.75,8147.89 cw(c5327.85,8134) v1@5347.5,8134 ; v1@5348.35,8133.65 cw(c5363.69,8118.31) 5363.69,8140 ; v1@5348.39,8162.69 ccw(c5361.68,8152.04) v1@5349.64,8140 ; 5359.96,8140 cw(c5359.96,8057.1) D2.2@5418.58,8115.72 ; 5403,8140 v1@5349.64,8140
  other v1: 5348,8134 5348,8163 5348,8191 5450.5,8368
NetC12_1: C12.1 U4.1 | length 63.7
  Top Layer w20: U4.1@5310,9106.36 5310.36,9106 C12.1@5373.5,9106
NetC12_2: C12.2 D3.2 L2.2 U4.8 | length 183.2
  Top Layer w20: U4.8@5311.33,8868.92 cw(c5332,8849.95) v1(5332,8878) ; U4.8@5311.6,8869.3 cw(c5326,8861.74) 5326,8878 v1(5332,8878) ; v1@5339.45,8878 cw(c5339.45,8815.58) D3.2@5383.58,8859.72 ; 5367.77,8878 ccw(c5367.77,8900.36) D3.2@5383.58,8884.55 ; D3.2@5396,8864.26 5382.26,8878 v1(5332,8878)
  other v1: 5330,8927 5428.5,9106
NetD4_1: D4.1 R5.2 | length 97.6
  Top Layer w20: D4.1@5097.38,8058.03 ccw(c5085.01,8070.4) 5102.5,8070.4 ; D4.1@5101.44,8052 5102.5,8053.06 R5.2@5102.5,8135.4
NetD5_1: D5.1 R6.2
  other v1: 5368.5,7514
NetD6_1: D6.1 R7.2 | length 98.8
  Top Layer w20: D6.1@5068.38,8799.03 ccw(c5056.01,8811.4) 5073.5,8811.4 ; D6.1@5072.44,8793 5073.5,8794.06 R7.2@5073.5,8877.65
NetD11_1: D11.1 R16.2
  other v1: 3369,9117
NetD12_1: D12.1 R17.2
  other v1: 3108,9116
NetD13_1: D13.1 R18.2
  other v1: 3870,9117
NetD14_1: D14.1 R19.2
  other v1: 3607,9116
NetD15_1: D15.1 R20.2
  other v1: 4373,9117
NetD16_1: D16.1 R21.2
  other v1: 4105,9117
NetD17_1: D17.1 R22.2
  other v1: 4800,9116
NetD18_1: D18.1 R23.2
  other v1: 4603,9114
NetGreen_2: Green.2 R14.2
  other v1: 4736.85,8508
NetK5_4: K5.4 R16.1 | length 250.6
  Bottom Layer w10: K5.4@3316.54,9201.78 R16.1@3370,9172.5 ; K5.4@3322.15,9182.58 cw(c3335.69,9136.24) 3358.88,9178.59 cw(c3382.08,9220.94) K5.4@3335.73,9207.39 ; 3339.63,9183.28 cw(c3331.26,9148.95) R16.1@3361.45,9167.31 ; 3344.56,9192.28 ccw(c3368.98,9217.83) R16.1@3369.77,9182.5 ; R16.1@3355.02,9179.53 ccw(c3358.08,9192.11) R16.1@3364.81,9181.05 ; R16.1@3356.01,9181.34 cw(c3347.06,9171.98) R16.1@3360,9172.27 ; R16.1@3360.4,9169.69 ccw(c3337.23,9162.92) 3348.83,9184.1 ccw(c3360.42,9205.27) R16.1@3367.19,9182.1
NetK5_6: K5.6 R17.1 | length 248.1
  Bottom Layer w10: R17.1@3108.8,9181.5 ccw(c3108.12,9214.66) 3132.05,9191.69 ; R17.1@3109,9171.5 K5.6@3159.06,9201.78 ; R17.1@3111.39,9181.21 ccw(c3117.16,9204.65) 3129.66,9184 ccw(c3142.15,9163.34) R17.1@3118.71,9169.11 ; R17.1@3113.82,9180.26 ccw(c3121.11,9193.5) 3125.32,9178.99 ; R17.1@3117.76,9166.68 cw(c3146.82,9150.68) 3137.58,9182.54 ; R17.1@3119,9171.7 cw(c3134.11,9172.01) R17.1@3123.21,9182.48 ; K5.6@3139.63,9206.56 cw(c3092.75,9218.1) 3117.74,9176.79 cw(c3142.73,9135.47) K5.6@3154.27,9182.36
NetK6_4: K6.4 R18.1 | length 249.7
  Bottom Layer w10: K6.4@3816.54,9201.78 R18.1@3869,9172.5 ; K6.4@3821.99,9182.54 cw(c3835.17,9136.09) 3858.7,9178.25 cw(c3882.23,9220.41) K6.4@3835.78,9207.24 ; 3839.19,9183.17 cw(c3830.73,9149.66) R18.1@3860.41,9167.37 ; 3844.27,9192.27 ccw(c3868.35,9217.06) R18.1@3868.85,9182.5 ; 3853.49,9179.56 ccw(c3856.84,9192.87) R18.1@3863.87,9181.09 ; R18.1@3854.84,9181.99 cw(c3845.28,9172.15) R18.1@3859,9172.35 ; R18.1@3859.38,9169.77 ccw(c3836.15,9163.18) 3847.92,9184.27 ccw(c3859.68,9205.35) R18.1@3866.27,9182.12
NetK6_6: K6.6 R19.1 | length 250.2
  Bottom Layer w10: R19.1@3606,9172.5 K6.6@3659.06,9201.78 ; R19.1@3606.19,9182.5 ccw(c3606.87,9217.51) 3631.15,9192.28 ; R19.1@3608.78,9182.11 ccw(c3615.47,9205.3) 3627.14,9184.16 ccw(c3638.8,9163.03) R19.1@3615.61,9169.73 ; R19.1@3611.17,9181.06 ccw(c3618.02,9192.42) 3621.2,9179.54 ; R19.1@3614.56,9167.33 cw(c3644.55,9149.24) 3636.14,9183.24 ; R19.1@3616,9172.31 cw(c3629.26,9172.05) R19.1@3620.06,9181.61 ; K6.6@3639.84,9207.33 cw(c3593.45,9220.72) 3616.78,9178.45 cw(c3640.11,9136.18) K6.6@3653.51,9182.56
NetK7_4: K7.4 R20.1 | length 250.6
  Bottom Layer w10: K7.4@4317.54,9201.78 R20.1@4371,9172.5 ; K7.4@4323.15,9182.58 cw(c4336.69,9136.24) 4359.88,9178.59 cw(c4383.08,9220.94) K7.4@4336.73,9207.39 ; 4340.63,9183.28 cw(c4332.26,9148.95) R20.1@4362.45,9167.31 ; 4345.56,9192.28 ccw(c4369.98,9217.83) R20.1@4370.77,9182.5 ; R20.1@4356.01,9179.53 ccw(c4359.08,9192.11) R20.1@4365.8,9181.05 ; R20.1@4357,9181.34 cw(c4348.06,9171.98) R20.1@4361,9172.27 ; R20.1@4361.4,9169.69 ccw(c4338.23,9162.92) 4349.82,9184.1 ccw(c4361.42,9205.27) R20.1@4368.19,9182.1
NetK7_6: K7.6 R21.1 | length 239.1
  Bottom Layer w10: R21.1@4104,9169.5 K7.6@4160.06,9201.78 ; R21.1@4104.01,9179.5 ccw(c4104.06,9218.13) 4131.34,9190.79 ; R21.1@4106.6,9179.16 ccw(c4112.87,9202.47) 4124.92,9181.55 ccw(c4136.97,9160.63) R21.1@4113.66,9166.9 ; R21.1@4112.66,9164.49 cw(c4146.09,9145.14) 4136.13,9182.46 ; K7.6@4140.74,9206.98 cw(c4094.12,9219.53) 4118.21,9177.68 cw(c4142.31,9135.84) K7.6@4154.86,9182.47
NetK8_4: K8.4 R22.1 | length 226.5
  Bottom Layer w10: R22.1@4742.58,9123.96 ccw(c4740.34,9148) 4758.92,9132.58 ccw(c4777.5,9117.16) R22.1@4753.46,9114.92 ; R22.1@4743.5,9114 K8.4@4815.54,9200.78 ; K8.4@4795.62,9198.93 cw(c4747.54,9194.47) 4784.7,9163.63 cw(c4821.85,9132.79) K8.4@4817.38,9180.87
NetK8_6: K8.6 R23.1 | length 252
  Bottom Layer w10: R23.1@4603,9171.5 K8.6@4658.06,9200.78 ; R23.1@4603.35,9181.49 ccw(c4604.62,9218.05) 4629.57,9191.3 ; R23.1@4605.92,9181.06 ccw(c4612.98,9204.15) 4624.32,9182.84 ccw(c4635.65,9161.52) R23.1@4612.56,9168.58 ; R23.1@4608.3,9179.98 ccw(c4614.5,9189.91) R23.1@4617.14,9178.5 ; R23.1@4611.48,9166.2 cw(c4642.5,9146.82) 4634.27,9182.46 ; R23.1@4612.99,9171.15 cw(c4624.7,9170.74) R23.1@4616.71,9179.31 ; K8.6@4638.93,9206.63 cw(c4592.75,9220.74) 4615.42,9178.11 cw(c4638.1,9135.48) K8.6@4652.21,9181.65
NetR1_1: R1.1 R2.2 U2.4 | length 181.4
  Top Layer w20: R2.2@5102.5,8295.13 R1.1@5102.5,8375 5169.36,8375 U2.4@5177,8367.36 ; 5154.19,8375 cw(c5154.19,8344.55) U2.4@5175.72,8366.08
NetR3_1: R3.1 R4.2 U4.4 | length 216.4
  Top Layer w20: R4.2@5073.5,9039.88 R3.1@5073.5,9121 5145.36,9121 U4.4@5160,9106.36 ; 5120.29,9121 cw(c5120.29,9066.65) U4.4@5158.72,9105.08
NetR11_2: R11.2 Red.2
  other v1: 4734.85,8205
NetR12_2: R12.2 Yellow.2
  other v1: 4735.85,8307
PA0: P7.16 P22.3 | length 1900.4
  Bottom Layer w10: P22.3@2566,7156 2695,7285 2695,7436 2808,7549 3907,7549 4014.37,7656.37 P7.16@4014.37,7664.63 ; P22.3@2566,7170.53 ccw(c2566,7205.6) 2590.8,7180.8 ccw(c2615.6,7156) P22.3@2580.53,7156 ; P22.3@2566,7180.53 ccw(c2566,7239.74) 2607.87,7197.87 ccw(c2649.74,7156) P22.3@2590.53,7156
PA1: P7.15 P22.4 | length 2143.9
  Bottom Layer w10: P22.4@2466,7156 2517,7207 2591,7207 2676,7292 2676,7455 2795,7574 3901,7574 3975,7648 3975,7704 P7.15@4014.37,7743.37 ; P22.4@2466,7170.53 ccw(c2466,7205.6) 2490.8,7180.8 ccw(c2515.6,7156) P22.4@2480.53,7156 ; P22.4@2466,7180.53 ccw(c2466,7239.74) 2507.87,7197.87 ccw(c2549.74,7156) P22.4@2490.53,7156 ; P7.15@3994.37,7743.37 cw(c3946.09,7743.37) 3980.23,7709.23 cw(c4014.37,7675.09) P7.15@4014.37,7723.37
PA2: P7.18 P22.1 | length 2037.8
  Bottom Layer w10: P22.1@2566,7056 2746,7236 2746,7414 2824,7492 3931,7492 4093.11,7654.11 P7.18@4093.11,7664.63 ; P22.1@2566,7070.53 ccw(c2566,7105.6) 2590.8,7080.8 ccw(c2615.6,7056) P22.1@2580.53,7056 ; P22.1@2566,7080.53 ccw(c2566,7139.74) 2607.87,7097.87 ccw(c2649.74,7056) P22.1@2590.53,7056
PA3: P7.17 P22.2 | length 2274.2
  Bottom Layer w10: P22.2@2466,7056 2518,7108 2586,7108 2719,7241 2719,7421 2818,7520 3926,7520 4054,7648 4054,7704.26 P7.17@4093.11,7743.37 ; P22.2@2466,7070.53 ccw(c2466,7105.6) 2490.8,7080.8 ccw(c2515.6,7056) P22.2@2480.53,7056 ; P22.2@2466,7080.53 ccw(c2466,7139.74) 2507.87,7097.87 ccw(c2549.74,7056) P22.2@2490.53,7056 ; P7.17@4073.11,7743.37 cw(c4024.83,7743.37) 4058.97,7709.23 cw(c4093.11,7675.09) P7.17@4093.11,7723.37
PA4: P7.19 P11.3 | length 854
  Bottom Layer w10: P7.19@4171.85,7743.37 4220.48,7792 4340,7792 4369,7763 4369,7505 P11.3@4284,7420 ; P7.19@4171.85,7763.37 ccw(c4171.85,7811.65) 4205.99,7777.51 ccw(c4240.13,7743.37) P7.19@4191.85,7743.37 ; P11.3@4284,7437.5 ccw(c4284,7479.75) 4313.87,7449.87 ccw(c4343.75,7420) P11.3@4301.5,7420 ; P11.3@4284,7447.5 ccw(c4284,7513.89) 4330.95,7466.95 ccw(c4377.89,7420) P11.3@4311.5,7420
PA5: P7.20 P10.3 | length 1135.3
  Top Layer w10: P7.20@4171.85,7664.63 4211.22,7704 4347,7704 4369,7682 4369,7136 P10.3@4284,7051 ; P7.20@4171.85,7684.63 ccw(c4171.85,7732.91) 4205.99,7698.77 ccw(c4240.13,7664.63) P7.20@4191.85,7664.63 ; P10.3@4284,7068.5 ccw(c4284,7110.75) 4313.87,7080.87 ccw(c4343.75,7051) P10.3@4301.5,7051 ; P10.3@4284,7078.5 ccw(c4284,7144.89) 4330.95,7097.95 ccw(c4377.89,7051) P10.3@4311.5,7051
PA6: P7.21 P11.2 | length 652.5
  Bottom Layer w10: P11.2@4114.55,7439.45 ccw(c4072.44,7481.56) 4132,7481.56 ; P11.2@4121.63,7432.37 ccw(c4096.58,7457.42) 4132,7457.42 ; P11.2@4132,7420 4132,7682 4155,7705 4212.22,7705 P7.21@4250.59,7743.37 ; 4132,7467.08 ccw(c4181.08,7467.08) P11.2@4146.37,7432.37 ; 4132,7491.22 ccw(c4205.22,7491.22) P11.2@4153.45,7439.45 ; P7.21@4230.59,7743.37 cw(c4182.31,7743.37) 4216.45,7709.23 cw(c4250.59,7675.09) P7.21@4250.59,7723.37
PA7: P7.22 P10.2 | length 908.4
  Top Layer w10: P10.2@4114.55,7070.45 ccw(c4067.61,7117.39) 4134,7117.39 ccw(c4200.39,7117.39) P10.2@4153.45,7070.45 ; P10.2@4121.63,7063.37 ccw(c4091.75,7093.25) 4134,7093.25 ccw(c4176.25,7093.25) P10.2@4146.37,7063.37 ; P10.2@4134,7051 4134,7348 4250.59,7464.59 P7.22@4250.59,7664.63 ; P7.22@4236.45,7650.49 cw(c4202.31,7616.35) 4250.59,7616.35 cw(c4298.88,7616.35) P7.22@4264.73,7650.49
PA8: P8.4 P20.3 | length 1728.7
  Bottom Layer w10: P8.4@4393.93,8991.51 ccw(c4359.79,9025.65) 4408.07,9025.65 ccw(c4456.36,9025.65) P8.4@4422.21,8991.51 ; P8.4@4408.07,8979.37 4408.07,9040.07 4649,9281 5283.24,9281 P20.3@5599,9596.76 ; P20.3@5571.5,9596.76 cw(c5505.11,9596.76) 5552.05,9549.82 cw(c5599,9502.87) P20.3@5599,9569.26 ; P20.3@5581.5,9596.76 cw(c5539.25,9596.76) 5569.13,9566.89 cw(c5599,9537.01) P20.3@5599,9579.26